# EAGLE board diy_random_voltage (EAGLE 7.6.0)

Size 73.58 x 63.39 mm. Coordinates in mm from the lower left corner, seen from the top.
Outline: 0,0 56.82,0 56.82,53.33 0,53.33 0,0
Copper layers (1*16): Top 0.035mm / dielectric 1.5mm / Bottom 0.035mm
Design rules "default": minimum track width 10mil, minimum drill 24mil, track to track 8mil, track to pad 8mil, pad to pad 8mil, via to via 8mil, smd to smd 8mil, copper to edge 40mil, drill to drill 8mil, minimum pad ring 10mil, minimum via ring 8mil, stop-mask expansion 4mil, vias tented up to drill 0mil, thermal gap 10mil

## Footprints (pad centres in the part's own frame; a part is rotated, then mirrored left to right if it is on the bottom)
LED5MM = drill 0.813 octagon: A -1.27,0; K 1.27,0
DC-POWER = drill 0.889 pad 2.54 octagon: + 0,2.54; - 0,-2.54
0207/10 = drill 0.813 octagon: 1 -5.08,0; 2 5.08,0
B25V = drill 0.813 long: A 2.54,0.635; E -2.54,0.635; S 0,0.635
TL1105 = drill 1 pad 1.676: 1 -2.25,3.25; 2 2.25,3.25; 3 -2.25,-3.25; 4 2.25,-3.25
TO220 = drill 1.118 long: 1 -2.54,-6.35; 2 0,-6.35; 3 2.54,-6.35 | hole 3.302: 0,11.176
ARDUINO_UNO = drill 1.016 pad 1.88: 0 63.5,50.8; 1 60.96,50.8; 2 58.42,50.8; 3 55.88,50.8; 3.3V 35.56,2.54; 4 53.34,50.8; 5 50.8,50.8; 5V 38.1,2.54; 6 48.26,50.8; 7 45.72,50.8; 8 41.656,50.8; 9 39.116,50.8; 10 36.576,50.8; 11 34.036,50.8; 12 31.496,50.8; 13 28.956,50.8; A0 50.8,2.54; A1 53.34,2.54; A2 55.88,2.54; A3 58.42,2.54; A4 60.96,2.54; A5 63.5,2.54; AREF 23.876,50.8; GND 26.416,50.8; GND. 43.18,2.54; GND.. 40.64,2.54; I/OREF 30.48,2.54; N/C 27.94,2.54; RESET 33.02,2.54; SCL 18.796,50.8; SDA 21.336,50.8; VIN 45.72,2.54 | hole 3.2: 66.04,7.62; 66.04,35.56; 15.24,50.8; 13.97,2.54

## Placement (x,y rotation side)
D1  [LED5MM]  5,22.78 0 top
D2  [LED5MM]  5,35.48 0 top
D3  [LED5MM]  5,48.18 0 top
D4  [LED5MM]  5,60.88 0 top
D5  [LED5MM]  5,73.58 0 top  (outside the outline)
D6  [LED5MM]  5,86.28 0 top  (outside the outline)
D7  [LED5MM]  5,98.98 0 top  (outside the outline)
D8  [LED5MM]  5,111.68 0 top  (outside the outline)
D9  [LED5MM]  5,225.98 0 top  (outside the outline)
Meter1  [DC-POWER]  5,162.48 0 top  (outside the outline)
R1  1k‎Ω  [0207/10]  5,124.38 0 top  (outside the outline)
R2  1k‎Ω  [0207/10]  5,137.08 0 top  (outside the outline)
R3  1k‎Ω  [0207/10]  5,251.38 0 top  (outside the outline)
R4  1k‎Ω  [0207/10]  5,238.68 0 top  (outside the outline)
Rpot3  250k‎Ω  [B25V]  5,149.78 0 top  (outside the outline)
Rpot4  100k‎Ω  [B25V]  5,187.88 0 top  (outside the outline)
Rpot5  100k‎Ω  [B25V]  5,200.58 0 top  (outside the outline)
S1  [TL1105]  5,213.28 0 top  (outside the outline)
T1  [TO220]  5,175.18 0 top  (outside the outline)
U2  [ARDUINO_UNO]  5,10.08 0 top

## Library data of the parts
D1-D9 Meter1 R1-R4 Rpot3-Rpot5 S1 T1 U2 = AUTODESK_CIRCUITS_BREADBOARD

## Nets
N$1: D1.A D2.A D3.A D4.A R1.1
N$2: D5.A D6.A D7.A D8.A R2.2
N$3: D1.K D5.K U2.8
N$4: D2.K D6.K U2.7
N$5: D3.K D7.K U2.6
N$6: D4.K D8.K U2.5
N$7: R1.2 U2.3
N$8: R2.1 U2.4
N$9: T1.1 U2.9
N$10: Meter1.- T1.2
N$11: Rpot5.S U2.A2
N$12: Rpot4.S U2.A1
N$13: Rpot3.S U2.A0
N$14: Meter1.+ Rpot3.E Rpot4.E Rpot5.E S1.4 U2.5V
N$15: S1.3
N$16: D9.A R4.2
N$17: R4.1 U2.12
N$18: S1.2
N$19: R3.2 S1.1 U2.11
N$20: D9.K R3.1 Rpot3.A Rpot4.A Rpot5.A T1.3 U2.GND.

## Tracks (layer width: path | path; a pad name or v marks a point on that pad's centre or on a via)
N$1  (4 unrouted)
N$2  (4 unrouted)
N$3  (2 unrouted)
N$4  (2 unrouted)
N$5  (2 unrouted)
N$6  (2 unrouted)
N$7  (1 unrouted)
N$8  (1 unrouted)
N$9  (1 unrouted)
N$10  (1 unrouted)
N$11  (1 unrouted)
N$12  (1 unrouted)
N$13  (1 unrouted)
N$14  (5 unrouted)
N$16  (1 unrouted)
N$17  (1 unrouted)
N$19  (2 unrouted)
N$20  (6 unrouted)